# Altium PCB PCB1.PcbDoc
Units mm, origin at the board's own origin, x right, y up, seen from the top; angles counter-clockwise.
Board outline 149.97 x 82 mm, 2 copper layers (Top Layer, Bottom Layer); 144 components, 154 nets, 444 pads, 12 vias.
Unrouted connection lines stored in the file: 1.
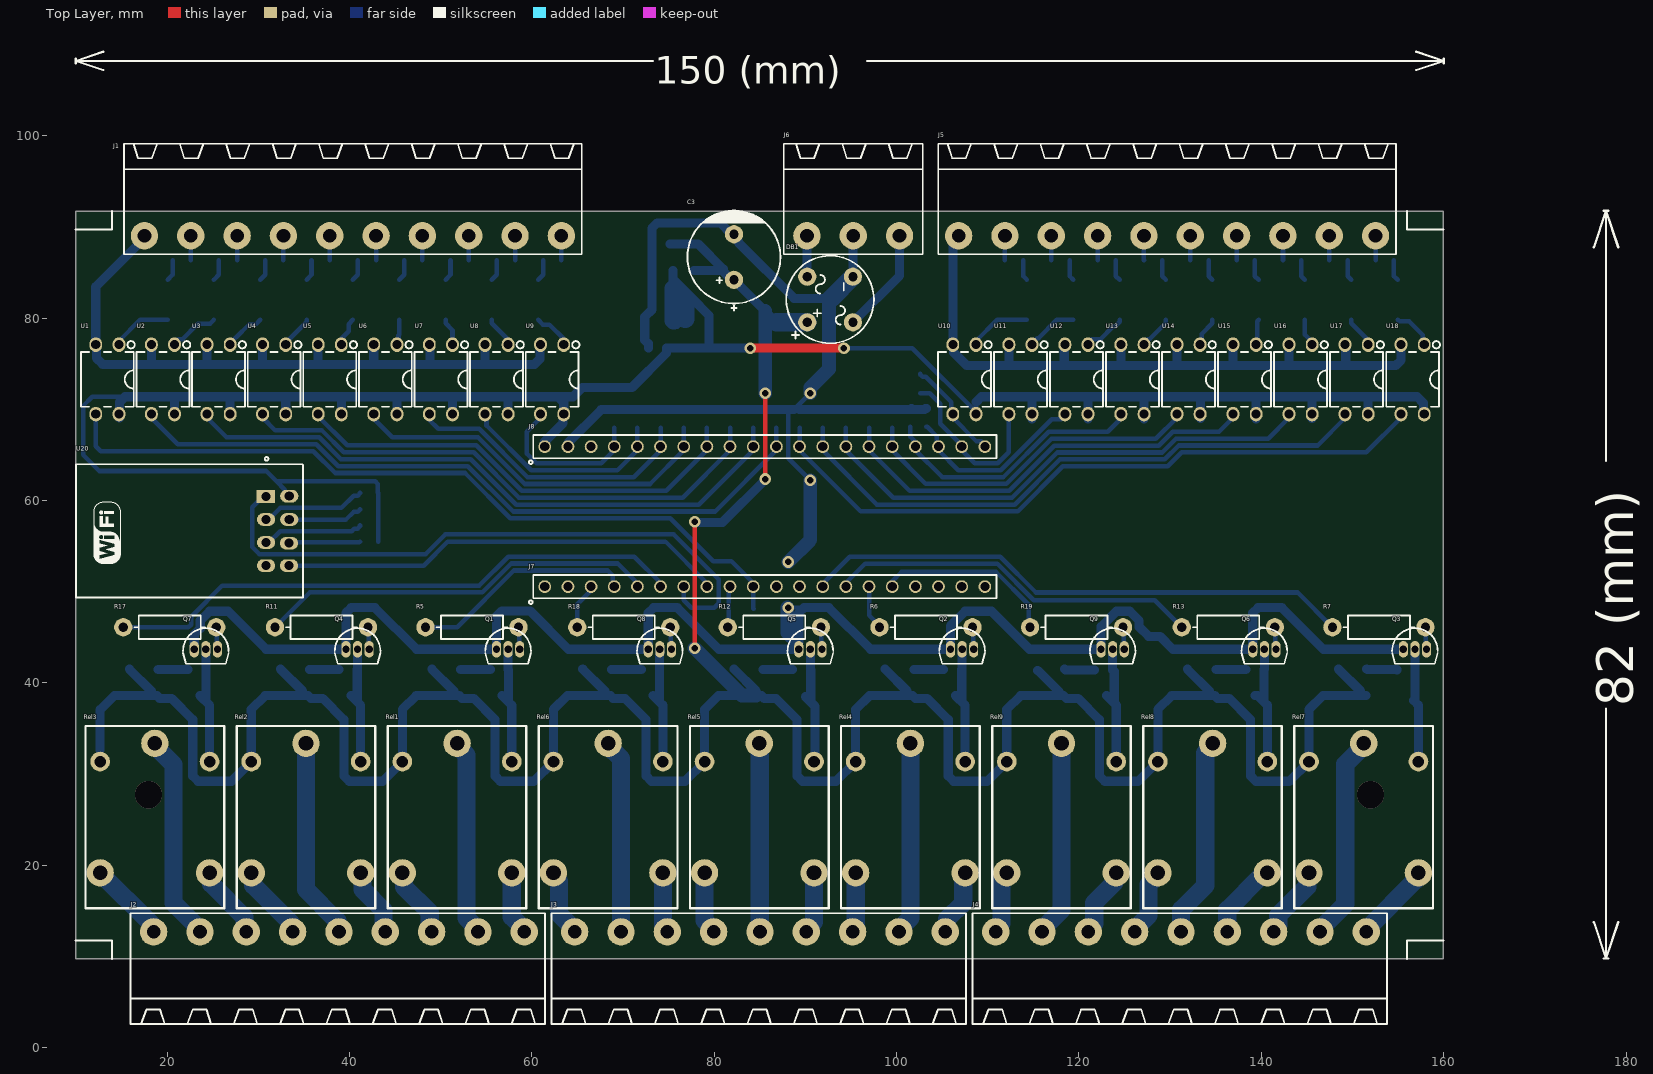
[diagram p0: Top Layer view]
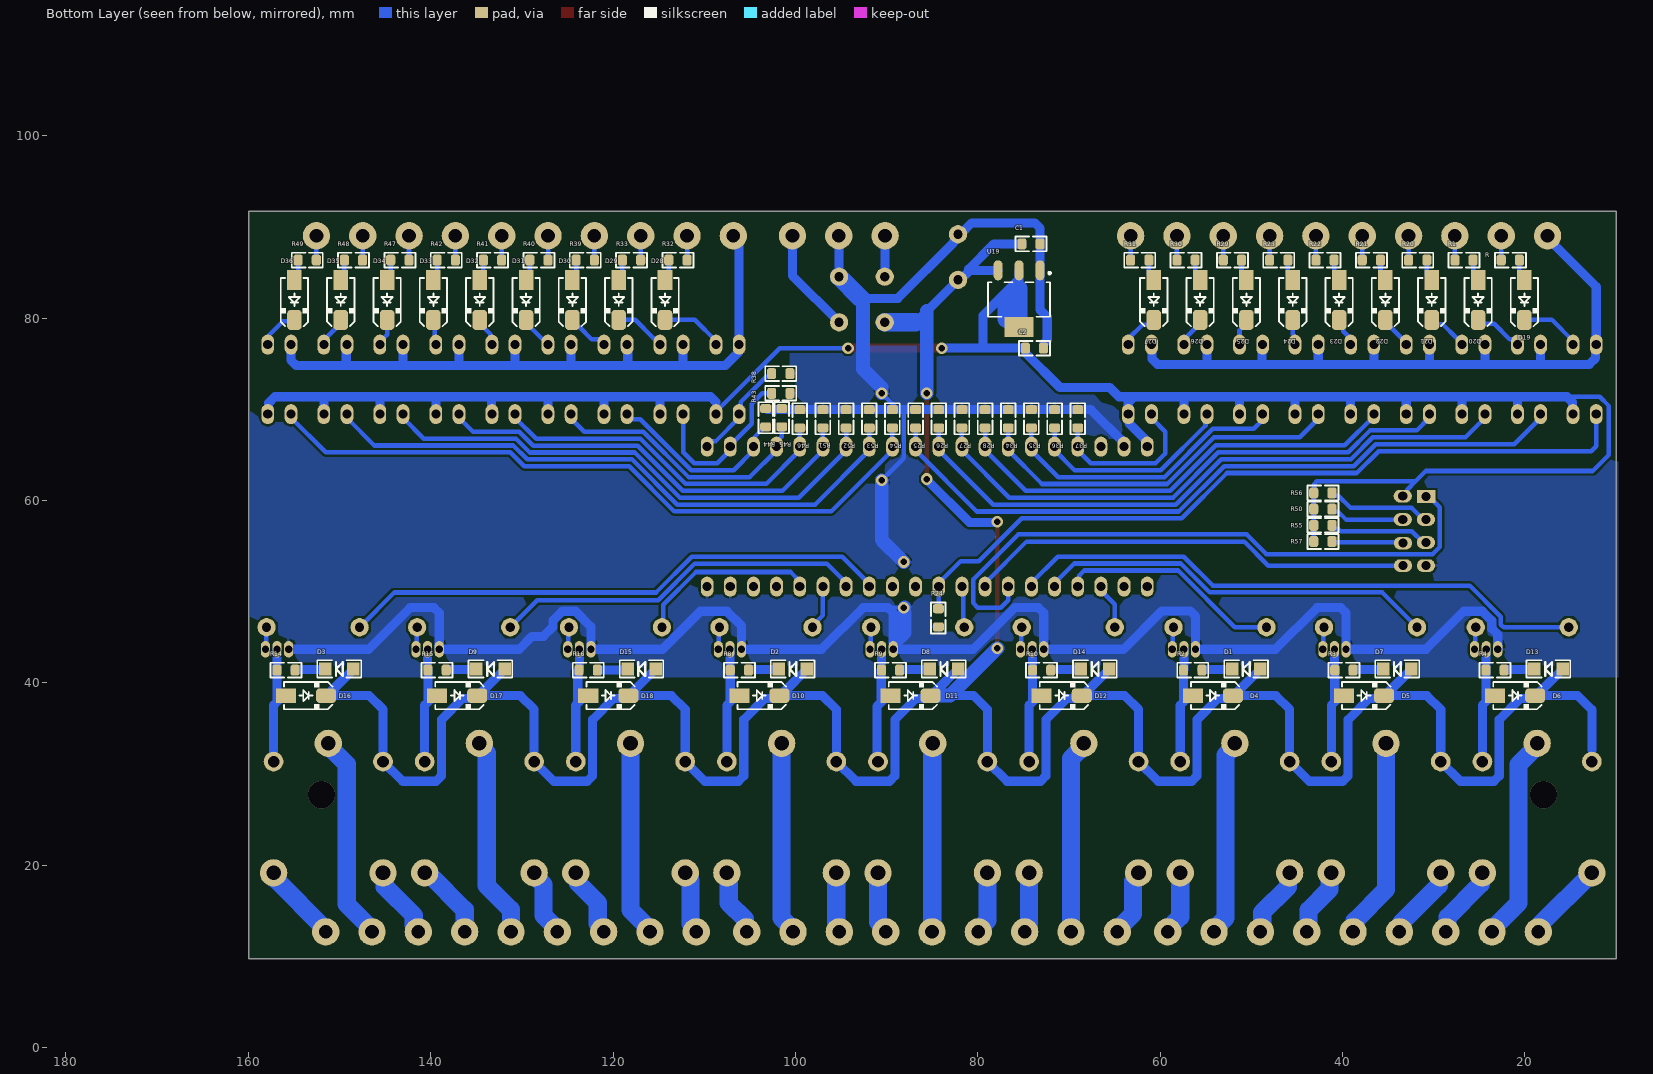
[diagram p1: Bottom Layer view, seen from below]

## Layer stack, top to bottom
Top Solder: solder mask 0.0102, Solder Resist, Dk 3.5
Top Layer: signal copper 0.0356
Dielectric 1: dielectric 0.32, FR-4, Dk 4.8
Bottom Layer: signal copper 0.0356
Bottom Solder: solder mask 0.0102, Solder Resist, Dk 3.5

## Board outline
10,9.744 159.967,9.744 159.967,91.744 10,91.744

## Design rules (kind name [scope] priority, off if disabled: settings)
Clearance [All] p1: gap=0.254 ignorepadtopadclearanceinfootprint=FALSE except(0: Arc-Hole Track-Hole SMDPad-Hole THPad-Hole Via-Hole Fill-Hole Poly-Hole Region-Hole Text-Hole)
DiffPairsRouting [All] p1: maxlimit=1 minlimit=0.3 mostfreqgap=0.4 toplayer_minwidth=0.4 toplayer_maxwidth=2 toplayer_prefwidth=0.4 bottomlayer_minwidth=0.4 bottomlayer_maxwidth=2 bottomlayer_prefwidth=0.4 maxuncoupledlength=12.7
PolygonConnect [All] p1: connectstyle=Relief reliefconductorwidth=0.254 reliefentries=4 polygonreliefangle="90 Angle" airgapwidth=0.254
RoutingVias [All] p1: holewidth=0.711 width=1.27 viastyle="Through Hole" minholewidth=0.711 minwidth=1.27 maxholewidth=0.711 maxwidth=1.27
SolderMaskExpansion [All] p1: expansion=0.102 istentingtop=FALSE
Width [All] p1: maxlimit=2 minlimit=0.3 preferedwidth=0.5
29 further rules are at their usual default settings.

## Components (designator, comment, footprint, x,y, rotation, side; value= is the part's Value field where it differs from the comment)
C1 "22uF" C0805 74.168,88.138 r0 bottom
C2 "22uF" C0805 73.787,76.708 r0 bottom
C3 "470uF" C_EL_10X16 82.169,86.701 r90 top
D1 "" "0805 LED" 50.571,41.529 r0 bottom
D2 "" "0805 LED" 100.292,41.529 r0 bottom
D3 "" "0805 LED" 150.012,41.529 r0 bottom
D4 "1N4007" D_SMA 54.229,38.608 r180 bottom
D5 "1N4007" D_SMA 37.655,38.608 r180 bottom
D6 "1N4007" D_SMA 21.082,38.608 r180 bottom
D7 "" "0805 LED" 33.998,41.529 r0 bottom
D8 "" "0805 LED" 83.718,41.529 r0 bottom
D9 "" "0805 LED" 133.439,41.529 r0 bottom
D10 "1N4007" D_SMA 103.95,38.608 r180 bottom
D11 "1N4007" D_SMA 87.376,38.608 r180 bottom
D12 "1N4007" D_SMA 70.802,38.608 r180 bottom
D13 "" "0805 LED" 17.424,41.529 r0 bottom
D14 "" "0805 LED" 67.145,41.529 r0 bottom
D15 "" "0805 LED" 116.865,41.529 r0 bottom
D16 "1N4007" D_SMA 153.67,38.608 r180 bottom
D17 "1N4007" D_SMA 137.096,38.608 r180 bottom
D18 "1N4007" D_SMA 120.523,38.608 r180 bottom
D19 "1N4007" D_SMA 20.066,82.001 r270 bottom
D20 "1N4007" D_SMA 25.146,82.001 r270 bottom
D21 "1N4007" D_SMA 30.226,82.001 r270 bottom
D22 "1N4007" D_SMA 35.306,82.001 r270 bottom
D23 "1N4007" D_SMA 40.386,82.001 r270 bottom
D24 "1N4007" D_SMA 45.466,82.001 r270 bottom
D25 "1N4007" D_SMA 50.546,82.001 r270 bottom
D26 "1N4007" D_SMA 55.626,82.001 r270 bottom
D27 "1N4007" D_SMA 60.706,82.001 r270 bottom
D28 "1N4007" D_SMA 114.3,82.001 r270 bottom
D29 "1N4007" D_SMA 119.38,82.001 r270 bottom
D30 "1N4007" D_SMA 124.46,82.001 r270 bottom
D31 "1N4007" D_SMA 129.54,82.001 r270 bottom
D32 "1N4007" D_SMA 134.62,82.001 r270 bottom
D33 "1N4007" D_SMA 139.7,82.001 r270 bottom
D34 "1N4007" D_SMA 144.78,82.001 r270 bottom
D35 "1N4007" D_SMA 149.86,82.001 r270 bottom
D36 "1N4007" D_SMA 154.94,82.001 r270 bottom
DB1 "BR-WOB" DBRG_C10 92.71,82.042 r90 top
J1 "CONN_TB10" MSTB_10 40.386,89.027 r0 top
J2 "CONN_TB9" MSTB_9 38.855,12.7 r180 top
J3 "CONN_TB9" MSTB_9 85.023,12.7 r180 top
J4 "CONN_TB9" MSTB_9 131.191,12.7 r180 top
J5 "CONN_TB10" MSTB_10 129.667,89.027 r0 top
J6 "CONN_TB3" MSTB_3 95.25,89.027 r0 top
J7 "HDRF20" HDR_F_1X20 85.553,50.554 r0 top
J8 "HDRF20" HDR_F_1X20 85.553,65.904 r0 top
Q1 "C945" TO92_3 57.404,43.688 r0 top
Q2 "C945" TO92_3 107.188,43.688 r0 top
Q3 "C945" TO92_3 156.845,43.688 r0 top
Q4 "C945" TO92_3 40.894,43.688 r0 top
Q5 "C945" TO92_3 90.551,43.688 r0 top
Q6 "C945" TO92_3 140.335,43.688 r0 top
Q7 "C945" TO92_3 24.257,43.688 r0 top
Q8 "C945" TO92_3 74.041,43.688 r0 top
Q9 "C945" TO92_3 123.698,43.688 r0 top
R "100K" R0805#1 21.606,86.36 r180 bottom
R1 "100K" R0805#2 26.686,86.36 r180 bottom
R2 "2.2K" R0805#1 56.429,41.402 r180 bottom
R3 "2.2K" R0805#1 39.856,41.4 r180 bottom
R4 "2.2K" R0805#1 23.282,41.4 r180 bottom
R5 "1K" R025W_AX04 53.447,46.101 r0 top
R6 "1K" R025W_AX04 103.231,46.101 r0 top
R7 "1K" R025W_AX04 152.888,46.101 r0 top
R8 "2.2K" R0805#1 106.15,41.4 r180 bottom
R9 "2.2K" R0805#1 89.576,41.4 r180 bottom
R10 "2.2K" R0805#1 73.003,41.4 r180 bottom
R11 "1K" R025W_AX04 36.937,46.101 r0 top
R12 "1K" R025W_AX04 86.594,46.101 r0 top
R13 "1K" R025W_AX04 136.378,46.101 r0 top
R14 "2.2K" R0805#1 155.87,41.4 r180 bottom
R15 "2.2K" R0805#1 139.297,41.4 r180 bottom
R16 "2.2K" R0805#1 122.723,41.4 r180 bottom
R17 "1K" R025W_AX04 20.3,46.101 r0 top
R18 "1K" R025W_AX04 70.084,46.101 r0 top
R19 "1K" R025W_AX04 119.741,46.101 r0 top
R20 "100K" R0805#1 31.766,86.36 r180 bottom
R21 "100K" R0805#1 36.846,86.36 r180 bottom
R22 "100K" R0805#1 41.926,86.36 r180 bottom
R23 "100K" R0805#1 47.006,86.36 r180 bottom
R24 "1K" R0805#1 84.328,47.133 r90 bottom
R25 "1K" R0805#1 86.823,68.961 r270 bottom
R26 "1K" R0805#1 84.283,68.961 r270 bottom
R27 "1K" R0805#1 81.743,68.961 r270 bottom
R28 "1K" R0805#1 79.203,68.961 r270 bottom
R29 "100K" R0805#1 52.086,86.36 r180 bottom
R30 "100K" R0805#1 57.166,86.36 r180 bottom
R31 "100K" R0805#1 62.246,86.36 r180 bottom
R32 "100K" R0805#1 112.887,86.36 r0 bottom
R33 "100K" R0805#1 117.969,86.36 r0 bottom
R34 "1K" R0805#1 76.663,68.961 r270 bottom
R35 "1K" R0805#1 74.123,68.961 r270 bottom
R36 "1K" R0805#1 71.583,68.961 r270 bottom
R37 "1K" R0805#1 69.043,68.961 r270 bottom
R38 "1K" R0805#1 101.608,73.914 r0 bottom
R39 "100K" R0805#1 123.051,86.36 r0 bottom
R40 "100K" R0805#1 128.133,86.36 r0 bottom
R41 "100K" R0805#1 133.215,86.36 r0 bottom
R42 "100K" R0805#1 138.297,86.36 r0 bottom
R43 "1K" R0805#1 101.608,71.755 r0 bottom
R44 "1K" R0805#1 103.266,69.08 r270 bottom
R45 "1K" R0805#1 101.503,69.08 r270 bottom
R46 "1K" R0805#1 99.523,68.961 r270 bottom
R47 "100K" R0805#1 143.379,86.36 r0 bottom
R48 "100K" R0805#1 148.461,86.36 r0 bottom
R49 "100K" R0805#1 153.543,86.36 r0 bottom
R50 "2.2K" R0805#1 42.164,59.055 r180 bottom
R51 "1K" R0805#1 96.983,68.961 r270 bottom
R52 "1K" R0805#1 94.443,68.961 r270 bottom
R53 "1K" R0805#1 91.903,68.961 r270 bottom
R54 "1K" R0805#1 89.363,68.961 r270 bottom
R55 "2.2K" R0805#1 42.164,57.277 r180 bottom
R56 "2.2K" R0805#1 42.164,60.833 r180 bottom
R57 "2.2K" R0805#1 42.164,55.499 r180 bottom
Rel1 "RelayGH-1C-12L" GH-1C-12L 51.808,25.273 r90 top
Rel2 "RelayGH-1C-12L" GH-1C-12L 35.239,25.273 r90 top
Rel3 "RelayGH-1C-12L" GH-1C-12L 18.669,25.273 r90 top
Rel4 "RelayGH-1C-12L" GH-1C-12L 101.517,25.273 r90 top
Rel5 "RelayGH-1C-12L" GH-1C-12L 84.947,25.273 r90 top
Rel6 "RelayGH-1C-12L" GH-1C-12L 68.378,25.273 r90 top
Rel7 "RelayGH-1C-12L" GH-1C-12L 151.226,25.273 r90 top
Rel8 "RelayGH-1C-12L" GH-1C-12L 134.656,25.273 r90 top
Rel9 "RelayGH-1C-12L" GH-1C-12L 118.087,25.273 r90 top
U1 "PC817" DIP_4 13.462,73.279 r270 top
U2 "PC817" DIP_4 19.558,73.279 r270 top
U3 "PC817" DIP_4 25.654,73.279 r270 top
U4 "PC817" DIP_4 31.75,73.279 r270 top
U5 "PC817" DIP_4 37.846,73.279 r270 top
U6 "PC817" DIP_4 43.942,73.279 r270 top
U7 "PC817" DIP_4 50.038,73.279 r270 top
U8 "PC817" DIP_4 56.134,73.279 r270 top
U9 "PC817" DIP_4 62.23,73.279 r270 top
U10 "PC817" DIP_4 107.442,73.279 r270 top
U11 "PC817" DIP_4 113.586,73.279 r270 top
U12 "PC817" DIP_4 119.729,73.279 r270 top
U13 "PC817" DIP_4 125.873,73.279 r270 top
U14 "PC817" DIP_4 132.017,73.279 r270 top
U15 "PC817" DIP_4 138.16,73.279 r270 top
U16 "PC817" DIP_4 144.304,73.279 r270 top
U17 "PC817" DIP_4 150.447,73.279 r270 top
U18 "PC817" DIP_4 156.591,73.279 r270 top
U19 "LD1117-3.3" SOT223_4 75.482,82.042 r270 bottom
U20 "ESP-01" ESP8266_ESP01 32.118,56.667 r90 top

## Footprints (in the part's own frame and the unit in brackets; to place one, negate y for a bottom-side part, rotate by r counter-clockwise, add the part's x,y. Pads: shape width x height; smd on the part's side, far side on the other; paste and mask are expansions set on the pad)
"0805 LED" [mil]
  rect 54x55 smd: 1(-61,0) 2(61,0)
  silkscreen extent -94,-37 95,37, body extent -40,-25 40,25, height 43
C0805 [mm] "CHIP Capacitor, 2.0X1.3mm, 0805"
  rrect50% 1x1.2 smd paste-0.1 mask+0.075: 1(-1,0) 2(1,0)
  Top Layer pour cut-out: -0.5,0.8 0.5,0.8 0.5,-0.8 -0.5,-0.8
  silkscreen extent -1.7,-0.8 1.7,0.8, body extent -1,-0.63 1,0.63, height 1
C_EL_10X16 [mm] "Capacitor Electrolythic, D10.0X16.0H pitch: 5.0mm"
  round 2 hole 1: 1(-2.5,0) 2(2.5,0)
  silkscreen extent -5.9,-5.1 5.1,5.1, body extent -5,-5 5,5, height 16
D_SMA [mm] "SMA Molded Diode, 2-Leads, Body 4.3x2.7mm, SOD-128"
  rect 2.2x1.6 smd paste-0.1: 1(-2.2,0)
  rrect50% 2.2x1.6 smd paste-0.1: 2(2.2,0)
  silkscreen extent -2.4,-1.5 2.9,1.5, body extent -2.75,-1.4 2.75,1.4, height 2.6
DBRG_C10 [mm] "BRDIGE RECTIFIER, WOB WOG, pitch: 5.08mm, 10X10mm"
  round 2 hole 1: 1(-2.5,2.5) 2(-2.5,-2.5) 3(2.5,-2.5) 4(2.5,2.5)
  silkscreen extent -4.8,-4.8 4.8,4.8, body extent -4.65,-4.64 4.65,4.64, height 5.6
DIP_4 [mm] "BRIDGE DIODE, DIP, pitch 2.54mm, 300mil Width"
  oval 1.6x1.4 / inner round 1.4 / far side oval 2.2x1.4 hole 1: 1(-3.81,1.27) 2(-3.81,-1.27) 3(3.81,-1.27) 4(3.81,1.27)
  silkscreen extent -4.2,-2.9 3,3, body extent -4,-2.77 4,2.77, height 4.31
ESP8266_ESP01 [mm] "ESP8266 ESP-01 Wi07C"
  rect 1.4x2 hole 1: 1(3.785,1.283)
  oval 1.4x2 hole 1: 2(3.81,-1.283) 3(1.245,1.257) 4(1.245,-1.283) 5(-1.27,1.257) 6(-1.346,-1.257) 7(-3.81,1.257) 8(-3.81,-1.257)
  silkscreen extent -7.29,-2.78 8.1,22.09, body extent -7.26,-2.76 7.24,22.04
GH-1C-12L [mm]
  round 3 hole 1.6: 1(8.1,0) 3(-6.1,6) 4(-6.1,-6)
  round 2.159 hole 1.27: 2(6.1,6) 5(6.1,-6)
  silkscreen extent -10,-7.6 10,7.6, body extent -9.71,-7.98 9.79,7.92, height 15
HDR_F_1X20 [mm] "Connector; Header; 20 Position"
  round 1.4 / inner round 1.4 / far side oval 1.4x2.2 hole 1: 1(-24.13,0) 2(-21.59,0) 3(-19.05,0) 4(-16.51,0) 5(-13.97,0) 6(-11.43,0) 7(-8.89,0) 8(-6.35,0) 9(-3.81,0) 10(-1.27,0) 11(1.27,0) 12(3.81,0) 13(6.35,0) 14(8.89,0) 15(11.43,0) 16(13.97,0) 17(16.51,0) 18(19.05,0) 19(21.59,0) 20(24.13,0)
  silkscreen extent -25.86,-1.9 25.4,1.27, body extent -25.4,-1.27 25.4,1.27, height 8.5
MSTB_3 [mm] "PHOENIX MSTB 2, 5-G, 5.08mm pitch, 3pin"
  round 3 hole 1.5: 1(-5.08,0) 2(0,0) 3(5.08,0)
  silkscreen extent -7.62,-2.03 7.62,10.1, body extent -7.5,-2 7.5,10, height 8.6
MSTB_9 [mm] "PHOENIX MSTB 2, 5-G, 5.08mm pitch"
  round 3 hole 1.5: 1(-20.32,0) 2(-15.24,0) 3(-10.16,0) 4(-5.08,0) 5(0,0) 6(5.08,0) 7(10.16,0) 8(15.24,0) 9(20.32,0)
  silkscreen extent -22.6,-2.03 22.86,10.1, body extent -22.5,-2 22.5,10, height 8.6
MSTB_10 [mm] "PHOENIX MSTB 2, 5-G, 5.08mm pitch"
  round 3 hole 1.5: 1(-22.86,0) 2(-17.78,0) 3(-12.7,0) 4(-7.62,0) 5(-2.54,0) 6(2.54,0) 7(7.62,0) 8(12.7,0) 9(17.78,0) 10(22.86,0)
  silkscreen extent -25.1,-2.03 25.1,10.1, body extent -25,-2 25,10, height 8.6
R025W_AX04 [mm] "RESISTOR 1/4 WATT, AXIAL0.4"
  round 2 hole 1: 1(-5.1,0) 2(5.1,0)
  silkscreen extent -3.9,-1.3 3.9,1.3, body extent -5.38,-1.28 5.38,1.28, height 2.6
R0805#1 [mm] "CHIP RESISTOR 1/8 WATT ,2.0X1.3mm, 0805, 2012"
  rrect50% 1x1.2 smd paste-0.1 mask+0.075: 1(-1,0) 2(1,0)
  Top Layer pour cut-out: -0.5,0.8 0.5,0.8 0.5,-0.8 -0.5,-0.8
  silkscreen extent -1.7,-0.8 1.7,0.8, body extent -1.15,-0.67 1.15,0.67, height 0.76
R0805#2 [mm] "CHIP RESISTOR 1/8 WATT ,2.0X1.3mm, 0805, 2012"
  rrect50% 1x1.2 smd paste-0.1 mask+0.075: 2(1,0) " "(-1,0)
  Top Layer pour cut-out: -0.5,0.8 0.5,0.8 0.5,-0.8 -0.5,-0.8
  silkscreen extent -1.7,-0.8 1.7,0.8, body extent -1.15,-0.67 1.15,0.67, height 0.76
SOT223_4 [mm] "SOT223, 4-Leads, Body 6.5x3.5mm, Pitch 2.30mm"
  oval 2.2x1 smd: 1(-3.2,2.3) 2(-3.2,0) 3(-3.2,-2.3)
  rect 2.2x3.2 smd paste-5: 4(3,0)
  Top Layer pour cut-out: -1.7,3.556 1.7,3.556 1.7,-3.556 -1.7,-3.556
  silkscreen extent -3.02,-3.4 1.9,3.47, body extent -3.5,-3.25 3.5,3.25, height 1.7
TO92_3 [mm] "TO-92, SOT54"
  oval 1x1.8 hole 0.8 mask+0.1: 1(-1.27,0) 2(0,0) 3(1.27,0)
  silkscreen extent -2.5,-1.59 2.5,2.3, body extent -2.38,-1.45 2.38,2.18, height 7.82

## Part data
C1 C2: library part CAP_SMD_MLCC_10u25V, "CAP, MLCC, X5R 10uF 10% 25V 0805", MANF="Taiyo Yuden", MANF_P#=TMK212BBJ106MG, PARAM="X5R, 10%", PARAM2=25V, Price=100=6$
C3: library part CAP_THD_EL_470uF_35v, "CAP, THD, ELEC,", ASSEMBLY=ASSEMBLY, DESC=DESCRIPTION, DIST#=MOUSER, MANF=MANF, MANF_P#=MANF_PART#, PARAM=20%, PARAM2=35v, Price="10= -$"
D1 D2 D3 D7 D8 D9 D13 D14 D15: library part LED, "Led", LatestRevisionDate=08-Jul-2005, LatestRevisionNote="Mech Layer 1 removed.", PackageReference=LED-0, Published=8-Jun-2000, Publisher="Altium Limited"
D4 D5 D6 D10 D11 D12 D16 D17 D18 D19 D20 D21 D22 D23 D24 D25 D26 D27 D28 D29 D30 D31 D32 D33 D34 D35 D36: library part DIODE_SMD_1N4007, "DIODE, GENERAL PURPOSE, 1000V/1A", ASSEMBLY=ASSEMBLY, DESC=DESCRIPTION, MANF=Kingtronics, MANF_P#=M7, PARAM="1000V VRRM", PARAM2=1A, Price=PRICE
DB1: library part DIODE_THD_BRIDGE_WO, "DIODE, BRIDGE,"
J1 J5: library part CONN_MSTB_10, "CONN, PHOENIX MSTB, 5-G, 5.08mm pitch", PARAM=12A, PARAM2=320V
J2 J3 J4: library part CONN_MSTB_9, "CONN, PHOENIX MSTB, 5-G, 5.08mm pitch", PARAM=12A, PARAM2=320V
J6: library part CONN_MSTB_3, "CONN, PHOENIX MSTB, 5-G, 5.08mm pitch", PARAM=12A, PARAM2=320V
J7 J8: library part HDR_F_1X20, "CONN, HEADER, Female, pitch: 2.54mm, 20POS"
Q1 Q2 Q3 Q4 Q5 Q6 Q7 Q8 Q9: library part NPN_C945_TO92, "BJT, NPN, 50v, 0.15A, THD, TO92, BC945", MANF=-, MANF_P#="C945, 2SC945, BC945", PARAM="50v, 0.15A", PARAM2=250mW
R: library part RES_SMD_0805, "RESISTOR, SMD", ASSEMBLY=ASSEMBLY, DESC=DESCRIPTION, DIST#=MOUSER, MANF=-, MANF_P#=-, PARAM=-W, PARAM2=1%, Price="100= 0.5$"
R1 R2 R3 R4 R8 R9 R10 R14 R15 R16 R20 R21 R22 R23 R24 R25 R26 R27 R28 R29 R30 R31 R32 R33 R34 R35 R36 R37 R38 R39 R40 R41 R42 R43 R44 R45 R46 R47 R48 R49 R50 R51 R52 R53 R54 R55 R56 R57: library part RES_SMD, "RESISTOR, SMD", ASSEMBLY=ASSEMBLY, DESC=DESCRIPTION, DIST#=MOUSER, MANF=-, MANF_P#=-, PARAM=-W, PARAM2=1%, Price="100= 0.5$"
R5 R6 R7 R11 R12 R13 R17 R18 R19: library part RES_THD, "RESISTOR, THD", ASSEMBLY=ASSEMBLY, DESC=DESCRIPTION, DIST#=MOUSER, MANF="KOA SPEER", MANF_P#=RK73H1ETTP4701F, PARAM=0.063W, PARAM2=1%, Price="100= 0.5$"
Rel1 Rel2 Rel3 Rel4 Rel5 Rel6 Rel7 Rel8 Rel9: "HJR-3FF-12VDC-S-Z"
U1 U2 U3 U4 U5 U6 U7 U8 U9 U10 U11 U12 U13 U14 U15 U16 U17 U18: library part OPTC_TR4P_PC817, "OPTOCOUPLER, TRANSISTOR, 4PIN", MANF=SHARP, MANF_P#=PC817, PARAM=IF=20mA, PARAM2="VCE = 35V", Price=-
U19: library part VREG_1117_SOT223, "REG, Linear, LDO1V, 0.8A, SOT-223", MANF="TI, ON, ST", MANF_P#="LD1117, LM1117, AMS1117, TLV1117, REG1117, NCP1117, LT1117, SPX1117", PARAM="LDO1V, 0.8A", PARAM2=1.2/1.5/1.8/2.5/2.85/3.3/5V
U20: library part ESP8266_ESP-01, "ESP8266 ESP-01 WiFi Module", MANF_P#=ESP-01

## Via types
v1: diameter 1.27, hole 0.711, Top Layer to Bottom Layer, 10 vias
v2: diameter 3, hole 3, Top Layer to Bottom Layer, 2 vias

## Nets (pads, with @x,y where several pads share a name; then routed paths per layer and width w, separated by ;. In a path a pad name is that pad's centre, name@x,y a point inside that pad or via, vN(x,y) a via of type N, cw(c..) or ccw(c..) an arc to the next point about the centre after c; other vN are vias at no path point)
3.3V: C2.2 J7.18 J8.1 R50.1 R55.1 R56.1 R57.1 U1.4 U2.4 U3.4 U4.4 U5.4 U6.4 U7.4 U8.4 U9.4 U10.4 U11.4 U12.4 U13.4 U14.4 U15.4 U16.4 U17.4 U18.4 U19.2 U19.4 U20.2 | length 259.6
  Top Layer w1: v1(83.959,76.708) v1(94.234,76.708)
  Bottom Layer w0.5: 15.394,71.374 11.811,71.374 10.795,70.358 10.795,65.024 12.583,63.236 30.871,63.236 32.004,62.103 ; U20.2@33.419,60.477 U20.2 33.345,60.477 32.929,60.893 32.929,61.178 32.004,62.103 ; R57.1 R55.1 R50.1 R56.1 43.127,60.87 43.127,61.81 42.834,62.103 32.004,62.103 ; J8.1 J8.1@61.423,66.489 ; U19.4 75.982,79.042 U19.4@76.832,79.892 ; 76.832,81.624 77.467,82.26 ; v1(94.234,76.708) 101.727,76.708 108.712,69.723 U10.4 ; U10.4@108.712,69.977 U10.4@108.712,70.492
  Bottom Layer w1: U1.4@14.809,69.038 14.809,70.788 15.394,71.374 20.828,71.374 ; U2.4 20.828,71.374 ; U3.4 26.924,71.374 ; U4.4 33.02,71.374 ; U5.4 39.116,71.247 38.989,71.374 ; U6.4 45.212,71.374 ; U7.4 51.308,71.247 51.181,71.374 ; U8.4 57.404,71.247 57.277,71.374 ; J8.1@61.423,66.489 61.499,66.489 61.623,66.612 61.623,66.689 63.423,68.489 63.423,69.392 U9.4 63.5,70.739 62.865,71.374 ; U19.2 75.482,84.245 76.036,83.691 77.467,82.26 79.453,80.274 79.453,76.708 ; v1(83.959,76.708) 79.453,76.708 ; 108.712,70.788 109.298,71.374 114.856,71.374 ; U11.4@114.856,68.961 U11.4 114.856,71.374 ; U12.4@120.999,68.961 U12.4 120.999,71.374 ; U13.4@127.143,68.961 U13.4 127.143,71.374 ; U14.4@133.35,69.025 133.35,71.374 ; U15.4@139.43,68.961 U15.4 139.43,71.374 ; U16.4@145.542,68.993 145.542,71.374 ; U17.4 151.717,71.042 ; U18.4 157.784,69.546 157.784,70.673 157.083,71.374 145.542,71.374 ; 20.828,71.374 26.924,71.374 ; 26.924,71.374 33.02,71.374 ; 33.02,71.374 38.989,71.374 ; 38.989,71.374 45.212,71.374 ; 45.212,71.374 51.181,71.374 ; 51.181,71.374 57.277,71.374 ; 57.277,71.374 62.865,71.374 ; 62.865,71.374 64.516,71.374 65.532,72.39 70.993,72.39 74.787,76.184 C2.2 79.453,76.708 ; 114.856,71.374 120.999,71.374 ; 120.999,71.374 127.143,71.374 ; 127.143,71.374 133.35,71.374 ; 133.35,71.374 139.43,71.374 ; 139.43,71.374 145.542,71.374
  Bottom Layer w2: U19.4@75.565,79.756 75.565,83.22 ; U19.4@76.832,79.892 76.832,81.624
5V: J8.3
12V: C1.2 C3.1 D1.1 D2.1 D3.1 D4.2 D5.2 D6.2 D7.1 D8.1 D9.1 D10.2 D11.2 D12.2 D13.1 D14.1 D15.1 D16.2 D17.2 D18.2 DB1.1 Rel1.2 Rel2.2 Rel3.2 Rel4.2 Rel5.2 Rel6.2 Rel7.2 Rel8.2 Rel9.2 U19.3 | length 364.2
  Top Layer w0.5: v1(77.851,43.815) 77.867,43.831 77.867,51.053 77.851,51.069 v1(77.851,57.654) ; v1(85.598,62.357) v1@85.598,71.628
  Bottom Layer w1: 12.669,32.643 12.669,37.053 14.224,38.608 D6.2 18.909,38.608 19.209,38.308 20.493,38.308 22.824,35.977 22.824,29.796 23.409,29.21 27.076,29.21 Rel2.2 29.239,37.089 30.757,38.608 D5.2 35.479,38.608 35.779,38.308 37.063,38.308 39.393,35.977 39.393,29.796 39.979,29.21 43.645,29.21 Rel1.2 45.808,37.089 47.327,38.608 D4.2 52.048,38.608 52.348,38.308 53.632,38.308 55.963,35.977 55.963,29.796 56.549,29.21 60.215,29.21 Rel6.2 62.378,37.089 63.897,38.608 D12.2 68.618,38.608 68.918,38.308 70.202,38.308 72.533,35.977 72.533,29.796 73.118,29.21 76.784,29.21 Rel5.2 78.947,37.089 80.466,38.608 83.058,38.608 ; D13.1@15.875,41.516 D6.2@18.282,39.109 ; D7.1@32.448,41.516 D5.2@34.856,39.109 ; D1.1@49.041,41.516 D4.2@51.448,39.109 ; D14.1@65.596,41.516 D12.2@68.003,39.109 ; C1.2 78.232,88.138 80.993,85.377 ; U19.3 80.857,85.242 81.898,84.201 C3.1 85.598,80.772 86.828,79.542 ; v1(77.851,57.654) 77.903,57.602 80.916,57.602 85.598,62.284 v1(85.598,62.357) ; D8.1@82.181,41.516 D11.2@84.588,39.109 ; D11.2@84.582,38.608 D11.2 85.188,38.608 85.488,38.308 86.771,38.308 89.102,35.977 89.102,29.796 89.688,29.21 93.354,29.21 Rel4.2 95.517,37.089 97.036,38.608 D10.2 101.757,38.608 102.057,38.308 103.341,38.308 105.672,35.977 105.672,29.796 106.258,29.21 109.924,29.21 Rel9.2 112.087,37.089 113.605,38.608 D18.2 118.327,38.608 118.627,38.308 119.911,38.308 122.241,35.977 122.241,29.796 122.827,29.21 126.493,29.21 Rel8.2 128.656,37.089 130.175,38.608 D17.2 135.196,38.308 136.48,38.308 138.811,35.977 138.811,29.796 139.397,29.21 143.063,29.21 Rel7.2 145.226,37.089 146.745,38.608 D16.2@151.17,38.608 ; D2.1@98.742,41.516 D10.2@101.15,39.109 ; D15.1@115.47,41.366 D18.2@117.877,38.959 ; D9.1@131.889,41.516 D17.2@134.297,39.109 ; D3.1 148.463,41.516 150.87,39.109 150.87,38.908 D16.2@151.17,38.608 ; D16.2 D16.2@151.17,38.608
  Bottom Layer w1.5: v1(77.851,43.815) 83.058,38.608 D11.2@84.582,38.608 ; v1(85.598,71.755) 85.598,80.772
  Bottom Layer w2: 86.828,79.542 DB1.1
com-Rel1: J2.2 Rel1.1 | length 21.6
  Bottom Layer w2: Rel1.1 51.808,33.102 52.832,32.079 52.832,14.234 54.095,12.971 J2.2
com-Rel2: J2.5 Rel2.1 | length 22.2
  Bottom Layer w2: Rel2.1 35.239,17.339 38.664,13.914 38.664,12.891 J2.5
com-Rel3: J2.8 Rel3.1 | length 22.7
  Bottom Layer w2: Rel3.1 18.669,33.102 20.721,31.05 20.721,15.865 23.615,12.971 J2.8
com-Rel4: J3.2 Rel4.1 | length 21.2
  Bottom Layer w2: J3.2 100.263,12.971 101.517,14.225 Rel4.1
com-Rel5: J3.5 Rel5.1 | length 20.7
  Bottom Layer w2: Rel5.1 84.985,33.335 84.985,12.738 J3.5
com-Rel6: J3.8 Rel6.1 | length 21.3
  Bottom Layer w2: Rel6.1 68.378,33.102 69.783,31.697 J3.8
com-Rel7: J4.2 Rel7.1 | length 22.7
  Bottom Layer w2: J4.2 146.431,12.971 149.213,15.753 149.213,31.089 151.226,33.102 Rel7.1
com-Rel8: J4.5 Rel8.1 | length 22.1
  Bottom Layer w2: J4.5 131.191,15.113 133.858,17.78 133.858,32.304 134.656,33.102 Rel8.1
com-Rel9: J4.8 Rel9.1 | length 21.6
  Bottom Layer w2: J4.8 115.951,12.971 118.087,15.106 Rel9.1
GND: C1.1 C2.1 C3.2 DB1.3 J6.2 J7.19 J7.20 J8.2 Q1.1 Q2.1 Q3.1 Q4.1 Q5.1 Q6.1 Q7.1 Q8.1 Q9.1 R24.1 R25.1 R26.1 R27.1 R28.1 R34.1 R35.1 R36.1 R37.1 R38.1 R43.1 R44.1 R45.1 R46.1 R51.1 R52.1 R53.1 R54.1 U19.1 U20.7 | length 302.1
  Bottom Layer w0.4: v1(88.128,48.26) 89.867,48.26
  Bottom Layer w0.5: v1@88.011,48.26 v1(88.128,48.26) ; R54.1@89.06,70.264 v1(90.551,71.755) ; R54.1 88.757,69.961 88.249,69.961 88.138,69.85 88.138,64.643 v1(90.551,62.23)
  Bottom Layer w1: Q7.1 22.987,45.319 23.646,45.978 23.646,46.828 24.673,47.855 26.694,47.855 30.861,43.688 Q4.1 39.624,47.674 40.21,48.26 42.799,48.26 47.371,43.688 Q1.1 56.134,47.305 56.72,47.891 59.805,47.891 64.008,43.688 Q8.1 72.771,47.674 73.357,48.26 75.946,48.26 80.518,43.688 Q5.1@89.047,43.688 ; J8.2 63.963,66.304 67.62,69.961 R37.1 R36.1 R35.1 R34.1 R28.1 R27.1 R26.1 R25.1 88.757,69.961 ; C2.1 72.787,77.2 72.39,77.597 72.39,80.13 73.182,80.923 U19.1 73.182,85.842 73.168,85.856 C1.1 73.168,89.854 73.754,90.44 80.659,90.44 81.898,89.201 C3.2 82.169,88.93 82.669,88.43 82.669,88.273 88.773,82.169 92.837,82.169 ; Q5.1@89.281,44.45 89.281,47.674 89.867,48.26 90.678,48.26 92.583,48.26 97.155,43.688 Q2.1 105.918,46.256 107.517,47.855 110.406,47.855 114.573,43.688 Q9.1 122.428,46.169 124.114,47.855 125.568,47.855 126.603,46.819 126.603,46.133 127.639,45.097 128.893,45.097 130.302,43.688 Q6.1 139.065,47.674 139.651,48.26 142.24,48.26 146.812,43.688 Q3.1 ; R54.1 R53.1 R52.1 R51.1 R46.1 R45.1@101.503,69.961 ; DB1.3@95.23,84.562 95.23,89.007 J6.2 ; R45.1@101.624,70.082 R45.1@101.503,69.961 ; R44.1 103.166,70.08 103.047,69.961 R45.1@101.503,69.961
  Bottom Layer w1.5: v1@88.011,48.26 88.011,45.486 Q5.1@89.047,44.45 ; v1(88.128,53.258) 90.551,55.681 v1(90.551,62.23) ; v1(90.551,71.755) 90.551,72.39 92.583,74.422 92.583,82.169
  Bottom Layer w2: 92.837,82.169 DB1.3 DB1.3@95.23,84.562
IN220vacPUT01: J1.2 R.1 | length 2.7
  Bottom Layer w0.5: R.1 J1.2
IN220vacPUT1N: J1.1 U1.2 U2.2 U3.2 U4.2 U5.2 U6.2 U7.2 U8.2 U9.2 | length 81.8
  Bottom Layer w1: J1.1 17.526,88.773 12.192,83.439 U1.2 12.269,77.012 12.269,75.615 12.954,74.93 18.288,74.93 ; U2.2 18.288,74.93 ; U3.2 24.384,75.057 24.257,74.93 ; U4.2 30.48,75.057 30.607,74.93 ; U5.2 36.576,74.93 ; U6.2 42.672,75.057 42.799,74.93 ; U7.2 48.845,77.012 48.845,75.107 49.022,74.93 ; U8.2 54.864,74.93 ; U9.2 60.883,77.012 60.883,75.516 60.298,74.93 54.864,74.93 ; 18.288,74.93 24.257,74.93 ; 24.257,74.93 30.607,74.93 ; 30.607,74.93 36.576,74.93 ; 36.576,74.93 42.799,74.93 ; 42.799,74.93 49.022,74.93 ; 49.022,74.93 54.864,74.93
IN220vacPUT02: J1.3 | length 2.7
  Bottom Layer w0.5: 27.686,86.36 J1.3
IN220vacPUT2N: J5.1 U10.2 U11.2 U12.2 U13.2 U14.2 U15.2 U16.2 U17.2 U18.2 | length 81
  Bottom Layer w1: J5.1 106.807,88.486 106.172,87.851 U10.2 106.249,77.012 106.249,76.25 107.696,74.803 112.141,74.803 ; U11.2 112.316,74.978 112.141,74.803 ; U12.2 118.383,77.012 118.383,74.949 118.237,74.803 ; U13.2 124.603,74.914 124.714,74.803 ; U14.2 130.746,74.867 130.683,74.803 ; U15.2 136.89,74.819 136.906,74.803 ; U16.2 143.034,74.898 143.129,74.803 ; U17.2 149.254,77.012 149.254,74.901 149.352,74.803 ; U18.2 155.321,75.389 154.735,74.803 149.352,74.803 ; 112.141,74.803 118.237,74.803 ; 118.237,74.803 124.714,74.803 ; 124.714,74.803 130.683,74.803 ; 130.683,74.803 136.906,74.803 ; 136.906,74.803 143.129,74.803 ; 143.129,74.803 149.352,74.803
IN220vacPUT03: J1.4 R20.1 | length 2.7
  Bottom Layer w0.5: R20.1 J1.4
IN220vacPUT04: J1.5 R21.1 | length 2.7
  Bottom Layer w0.5: R21.1 J1.5
IN220vacPUT05: J1.6 R22.1 | length 2.7
  Bottom Layer w0.5: R22.1 J1.6
IN220vacPUT06: J1.7 R23.1 | length 2.7
  Bottom Layer w0.5: R23.1 J1.7
IN220vacPUT07: J1.8 R29.1 | length 2.7
  Bottom Layer w0.5: R29.1 J1.8
IN220vacPUT08: J1.9 R30.1 | length 2.7
  Bottom Layer w0.5: R30.1 J1.9
IN220vacPUT09: J1.10 R31.1 | length 2.7
  Bottom Layer w0.5: R31.1 J1.10
IN220vacPUT10: J5.2 R32.1 | length 2.7
  Bottom Layer w0.5: R32.1 J5.2
IN220vacPUT11: J5.3 R33.1 | length 2.7
  Bottom Layer w0.5: J5.3 J5.3 116.968,86.361 R33.1
IN220vacPUT12: J5.4 R39.1 | length 2.7
  Bottom Layer w0.5: J5.4 122.049,89.025 122.049,86.362 R39.1
IN220vacPUT13: J5.5 R40.1 | length 2.7
  Bottom Layer w0.5: J5.5 127.13,89.024 127.13,86.363 R40.1
IN220vacPUT14: J5.6 R41.1 | length 2.7
  Bottom Layer w0.5: J5.6 132.211,89.023 132.211,86.364 R41.1
IN220vacPUT15: J5.7 R42.1 | length 2.7
  Bottom Layer w0.5: J5.7 137.292,89.022 137.292,86.365 R42.1
IN220vacPUT16: J5.8 R47.1 | length 2.7
  Bottom Layer w0.5: J5.8 142.373,89.021 142.373,86.366 R47.1
IN220vacPUT17: J5.9 R48.1 | length 2.7
  Bottom Layer w0.5: J5.9 147.454,89.02 147.454,86.367 R48.1
IN220vacPUT18: J5.10 R49.1 | length 2.7
  Bottom Layer w0.5: J5.10 152.535,89.019 152.535,86.368 R49.1
INPUT-flag01: J7.10 R24.2 U1.3 | length 84.7
  Bottom Layer w0.5: U1.3 12.192,65.952 12.723,65.421 36.052,65.421 38.457,63.016 52.681,63.016 57.658,58.039 75.184,58.039 79.883,53.34 81.897,53.34 84.283,50.954 J7.10 84.306,50.531 84.306,48.155 R24.2
INPUT-flag02: J8.11 R25.2 U2.3 | length 78.4
  Bottom Layer w0.5: U2.3 18.288,69.069 21.182,66.175 36.364,66.175 38.769,63.77 52.993,63.77 57.97,58.793 80.112,58.793 86.823,65.504 J8.11 R25.2
INPUT-flag03: J8.10 R26.2 U3.3 | length 69.2
  Bottom Layer w0.5: U3.3 24.384,69.069 26.524,66.929 36.677,66.929 39.082,64.524 53.306,64.524 58.283,59.547 78.326,59.547 84.283,65.504 J8.10 R26.2
INPUT-flag04: J8.9 R27.2 U4.3 | length 59.9
  Bottom Layer w0.5: U4.3 30.48,69.069 31.866,67.683 36.989,67.683 39.394,65.278 53.618,65.278 58.595,60.301 76.54,60.301 81.743,65.504 J8.9 R27.2
INPUT-flag05: J8.8 R28.2 U5.3 | length 50.6
  Bottom Layer w0.5: U5.3 36.576,69.215 39.751,66.04 53.922,66.04 58.907,61.055 74.754,61.055 79.203,65.504 J8.8 R28.2
INPUT-flag06: J8.7 R34.2 U6.3 | length 41.4
  Bottom Layer w0.5: U6.3 42.672,68.961 44.704,66.929 54.1,66.929 59.22,61.809 72.968,61.809 76.663,65.504 J8.7 R34.2
INPUT-flag07: J8.6 R35.2 U7.3 | length 32.3
  Bottom Layer w0.5: U7.3 48.768,68.834 49.737,67.865 54.23,67.865 59.532,62.563 71.182,62.563 74.123,65.504 J8.6 R35.2
INPUT-flag08: J8.5 R36.2 U8.3 | length 23.3
  Bottom Layer w0.5: U8.3 55.036,69.297 55.036,68.218 59.937,63.317 69.396,63.317 71.583,65.504 J8.5 R36.2
INPUT-flag09: J8.4 R37.2 U9.3 | length 18.1
  Bottom Layer w0.5: U9.3 60.96,69.069 59.436,67.545 59.436,65.151 60.516,64.071 67.61,64.071 69.043,65.504 J8.4 R37.2
INPUT-flag10: J8.20 R38.2 U10.3 | length 11.4
  Bottom Layer w0.5: R38.2 102.608,73.814 102.858,73.564 103.22,73.564 106.018,70.766 106.018,69.223 108.765,66.476 109.267,66.476 109.683,66.06 J8.20
INPUT-flag11: J8.19 R43.2 U11.3 | length 19.2
  Bottom Layer w0.5: R43.2 103.632,71.755 104.775,70.612 104.775,68.428 107.143,66.06 J8.19 107.143,65.504 108.568,64.079 111.098,64.079 112.316,65.297 U11.3
INPUT-flag12: J8.18 R44.2 U12.3 | length 20.6
  Bottom Layer w0.5: R44.2 103.366,68.08 104.431,67.015 104.431,66.076 J8.18 104.603,65.504 106.782,63.325 111.41,63.325 117.009,68.924 118.044,68.924 118.459,69.34 U12.3
INPUT-flag13: J8.17 R45.2 U13.3 | length 29.7
  Bottom Layer w0.5: R45.2 101.503,67.013 102.063,66.453 102.063,65.504 104.996,62.571 111.722,62.571 116.675,67.524 123.15,67.524 124.603,68.977 U13.3
INPUT-flag14: J8.16 R46.2 U14.3 | length 38.6
  Bottom Layer w0.5: R46.2 99.523,65.504 103.21,61.817 112.035,61.817 116.988,66.77 128.442,66.77 130.746,69.075 U14.3
INPUT-flag15: J8.15 R51.2 U15.3 | length 47.9
  Bottom Layer w0.5: R51.2 96.983,65.504 101.424,61.063 112.347,61.063 117.3,66.016 128.754,66.016 130.278,67.54 135.361,67.54 136.89,69.069 U15.3
INPUT-flag16: J8.14 R52.2 U16.3 | length 57.2
  Bottom Layer w0.5: R52.2 94.443,65.504 99.638,60.309 112.659,60.309 117.612,65.262 129.117,65.262 130.641,66.786 140.751,66.786 143.034,69.069 U16.3
INPUT-flag17: J8.13 R53.2 U17.3 | length 66.6
  Bottom Layer w0.5: R53.2 91.903,65.504 97.852,59.555 112.972,59.555 117.925,64.508 129.429,64.508 130.953,66.032 146.169,66.032 149.177,69.04 U17.3
INPUT-flag18: J8.12 R54.2 U18.3 | length 75.8
  Bottom Layer w0.5: R54.2 J8.12 89.363,65.504 96.066,58.801 113.284,58.801 118.237,63.754 129.741,63.754 131.265,65.278 151.511,65.278 155.321,69.088 U18.3
nc-Rel1: J2.1 Rel1.4 | length 7
  Bottom Layer w2: Rel1.4 57.808,14.337 59.175,12.971 J2.1
nc-Rel2: J2.4 Rel2.4 | length 7.6
  Bottom Layer w2: Rel2.4 41.43,18.982 41.43,17.371 43.744,15.057 43.744,12.891 J2.4
nc-Rel3: J2.7 Rel3.4 | length 8.1
  Bottom Layer w2: Rel3.4 24.86,18.982 24.86,17.939 28.504,14.295 28.504,12.891 J2.7
nc-Rel4: J3.1 Rel4.4 | length 7.4
  Bottom Layer w2: J3.1 105.534,12.891 105.534,14.094 107.326,15.886 107.326,18.982 Rel4.4
nc-Rel5: J3.4 Rel5.4 | length 6.8
  Bottom Layer w2: J3.4 90.103,12.971 90.947,13.815 Rel5.4
nc-Rel6: J3.7 Rel6.4 | length 6.7
  Bottom Layer w2: Rel6.4 74.378,13.456 74.863,12.971 J3.7
nc-Rel7: J4.1 Rel7.4 | length 8.8
  Bottom Layer w2: J4.1 151.511,12.954 157.035,18.478 157.035,18.982 Rel7.4
nc-Rel8: J4.4 Rel8.4 | length 8.5
  Bottom Layer w2: J4.4 136.271,15.113 140.14,18.982 140.465,18.982 Rel8.4
nc-Rel9: J4.7 Rel9.4 | length 7.7
  Bottom Layer w2: J4.7 121.031,12.971 121.666,13.606 121.666,15.875 123.895,18.104 123.895,18.982 Rel9.4
NetD1_2: D1.2 R2.2 | length 3.2
  Bottom Layer w1: D1.2@52.205,41.465 R2.2@55.448,41.465
NetD2_2: D2.2 R8.2 | length 3.2
  Bottom Layer w1: D2.2@101.906,41.465 R8.2@105.15,41.465
NetD3_2: D3.2 R14.2 | length 3.4
  Bottom Layer w1: D3.2 151.626,41.465 154.87,41.465 R14.2
NetD4_1: D4.1 Q1.2 R2.1 Rel1.5 | length 13.1
  Bottom Layer w1: D4.1@56.752,38.608 57.808,37.552 Rel1.5 ; Q1.2 57.404,41.445 57.448,41.4 D4.1@57.448,38.252
NetD5_1: D5.1 Q4.2 R3.1 Rel2.5 | length 13.1
  Bottom Layer w1: D5.1@40.183,38.608 41.239,37.552 Rel2.5 ; D5.1@40.856,38.252 R3.1 40.856,41.5 40.894,41.539 Q4.2
NetD6_1: D6.1 Q7.2 R4.1 Rel3.5 | length 13.1
  Bottom Layer w1: D6.1@23.613,38.608 24.669,37.552 Rel3.5 ; Q7.2 24.257,41.525 24.282,41.5 R4.1 D6.1@24.282,38.252
NetD7_2: D7.2 R3.2 | length 3.2
  Bottom Layer w1: D7.2@35.612,41.465 R3.2@38.856,41.465
NetD8_2: D8.2 R9.2 | length 3.2
  Bottom Layer w1: D8.2@85.344,41.465 R9.2@88.588,41.465
NetD9_2: D9.2 R15.2 | length 3.2
  Bottom Layer w1: D9.2@135.053,41.465 R15.2@138.297,41.465
NetD10_1: D10.1 Q2.2 R8.1 Rel4.5 | length 13.1
  Bottom Layer w1: D10.1@106.461,38.608 107.517,37.552 Rel4.5 ; D10.1@107.15,38.252 R8.1 107.15,41.5 107.188,41.539 Q2.2
NetD11_1: D11.1 Q5.2 R9.1 Rel5.5 | length 13.2
  Bottom Layer w1: D11.1@90.003,38.477 91.059,37.421 Rel5.5@91.059,31.242 ; Q5.2@90.551,43.815 Q5.2 90.551,41.525 90.576,41.5 R9.1 ; D11.1@90.588,38.252 R9.1@90.588,41.4
NetD12_1: D12.1 Q8.2 R10.1 Rel6.5 | length 13.1
  Bottom Layer w1: D12.1@73.322,38.608 74.378,37.552 Rel6.5 ; D12.1@74.003,38.252 R10.1 74.003,42.746 74.025,42.769 74.025,43.18 74.041,43.196 Q8.2
NetD13_2: D13.2 R4.2 | length 3.2
  Bottom Layer w1: D13.2@19.038,41.465 R4.2@22.282,41.465
NetD14_2: D14.2 R10.2 | length 3.2
  Bottom Layer w1: D14.2@68.759,41.465 R10.2@72.003,41.465
NetD15_2: D15.2 R16.2 | length 3.4
  Bottom Layer w1: D15.2 118.543,41.4 R16.2
NetD16_1: D16.1 Q3.2 R14.1 Rel7.5 | length 12.6
  Bottom Layer w1: Q3.2 156.845,41.525 156.87,41.5 R14.1 156.87,38.252 156.698,38.08 157.226,37.552 Rel7.5
NetD17_1: D17.1 Q6.2 R15.1 Rel8.5 | length 13.4
  Bottom Layer w1: D17.1 139.597,38.608 140.656,37.548 Rel8.5 ; D17.1@140.297,38.252 R15.1 140.297,41.5 140.335,41.539 Q6.2
NetD18_1: D18.1 Q9.2 R16.1 Rel9.5 | length 13.3
  Bottom Layer w1: D18.1@123.031,38.608 124.087,37.552 Rel9.5 ; Q9.2 123.698,41.429 123.877,41.25 123.877,38.102
NetD19_1: D19.1 R.2 | length 2.4
  Bottom Layer w0.5: D19.1 20.606,84.741 R.2
NetD19_2: D19.2 U1.1 | length 6.7
  Bottom Layer w0.5: U1.1 14.732,77.489 17.044,79.801 D19.2
NetD20_1: D20.1 R1.2 | length 2.4
  Bottom Layer w0.5: D20.1 25.686,84.741 R1.2
NetD20_2: D20.2 U2.1 | length 5.5
  Bottom Layer w0.5: U2.1 20.828,77.245 21.244,77.661 21.654,77.661 23.368,79.375 24.72,79.375 D20.2
NetD21_1: D21.1 R20.2 | length 2.4
  Bottom Layer w0.5: D21.1 30.766,84.741 R20.2
NetD21_2: D21.2 U3.1 | length 4.5
  Bottom Layer w0.5: U3.1 26.924,77.245 27.565,77.886 27.577,77.886 28.996,79.305 29.73,79.305 D21.2
NetD22_1: D22.1 R21.2 | length 2.4
  Bottom Layer w0.5: D22.1 35.846,84.741 R21.2
NetD22_2: D22.2 U4.1 | length 3.7
  Bottom Layer w0.5: U4.1 33.02,77.296 35.306,79.582 D22.2
NetD23_1: D23.1 R22.2 | length 2.4
  Bottom Layer w0.5: D23.1 40.926,84.741 R22.2
NetD23_2: D23.2 U5.1 | length 3.2
  Bottom Layer w0.5: U5.1 39.116,77.733 39.929,78.545 39.929,79.344 D23.2
NetD24_1: D24.1 R23.2 | length 2.4
  Bottom Layer w0.5: D24.1 46.006,84.741 R23.2
NetD24_2: D24.2 U6.1 | length 2.8
  Bottom Layer w0.5: U6.1 45.212,77.597 45.384,77.769 45.384,78.116 45.466,78.198 D24.2
NetD25_1: D25.1 R29.2 | length 2.4
  Bottom Layer w0.5: D25.1 51.086,84.741 R29.2
NetD25_2: D25.2 U7.1 | length 3
  Bottom Layer w0.5: D25.2 50.546,79.432 51.308,78.67 U7.1
NetD26_1: D26.1 R30.2 | length 2.4
  Bottom Layer w0.5: D26.1 56.166,84.741 R30.2
NetD26_2: D26.2 U8.1 | length 3.4
  Bottom Layer w0.5: D26.2 55.626,79.42 57.404,77.642 U8.1
NetD27_1: D27.1 R31.2 | length 2.4
  Bottom Layer w0.5: D27.1 61.246,84.741 R31.2
NetD27_2: D27.2 U9.1 | length 4.3
  Bottom Layer w0.5: D27.2 61.211,79.296 61.928,79.296 63.5,77.724 U9.1
NetD28_1: D28.1 R32.2 | length 2.3
  Bottom Layer w0.5: R32.2 113.887,84.614 D28.1
NetD28_2: D28.2 U10.1 | length 6.9
  Bottom Layer w0.5: U10.1 108.712,77.489 111.024,79.801 D28.2
NetD29_1: D29.1 R33.2 | length 2.3
  Bottom Layer w0.5: R33.2 118.969,84.612 D29.1
NetD29_2: D29.2 U11.1 | length 5.7
  Bottom Layer w0.5: U11.1 114.856,77.245 115.424,77.814 115.581,77.814 117.568,79.801 D29.2
NetD30_1: D30.1 R39.2 | length 2.3
  Bottom Layer w0.5: R39.2 124.051,84.61 D30.1
NetD30_2: D30.2 U12.1 | length 4.8
  Bottom Layer w0.5: U12.1 120.999,77.245 121.415,77.661 122.32,77.661 123.703,79.044 123.921,79.044 124.46,79.582 D30.2
NetD31_1: D31.1 R40.2 | length 2.3
  Bottom Layer w0.5: R40.2 129.133,84.608 D31.1
NetD31_2: D31.2 U13.1 | length 3.8
  Bottom Layer w0.5: U13.1 127.143,77.245 127.559,77.661 127.7,77.661 129.54,79.501 D31.2
NetD32_1: D32.1 R41.2 | length 2.3
  Bottom Layer w0.5: R41.2 134.215,84.606 D32.1
NetD32_2: D32.2 U14.1 | length 3.3
  Bottom Layer w0.5: U14.1 133.459,77.261 133.459,78.259 134.62,79.42 D32.2
NetD33_1: D33.1 R42.2 | length 2.3
  Bottom Layer w0.5: R42.2 139.297,84.604 D33.1
NetD33_2: D33.2 U15.1 | length 2.8
  Bottom Layer w0.5: U15.1 139.565,77.224 139.565,79.666 D33.2
NetD34_1: D34.1 R47.2 | length 2.3
  Bottom Layer w0.5: R47.2 144.379,84.602 D34.1
NetD34_2: D34.2 U16.1 | length 3
  Bottom Layer w0.5: D34.2 144.78,78.198 145.574,77.404 U16.1
NetD35_1: D35.1 R48.2 | length 2.3
  Bottom Layer w0.5: R48.2 149.461,84.6 D35.1
NetD35_2: D35.2 U17.1 | length 3.5
  Bottom Layer w0.5: D35.2 149.86,79.424 151.717,77.566 U17.1
NetD36_1: D36.1 R49.2 | length 2.3
  Bottom Layer w0.5: R49.2 154.543,84.598 D36.1
NetD36_2: D36.2 U18.1 | length 4.6
  Bottom Layer w0.5: D36.2 155.099,79.642 156.197,79.642 157.689,78.15 157.689,77.261 U18.1
NetDB1_2: DB1.2 J6.3 | length 11.6
  Bottom Layer w1: DB1.2 100.33,84.662 J6.3
NetDB1_4: DB1.4 J6.1 | length 4.5
  Bottom Layer w1: J6.1 90.19,89.007 90.19,84.562 DB1.4
NetQ1_3: Q1.3 R5.2 | length 2.5
  Bottom Layer w0.5: R5.2 58.61,46.038 58.61,43.752 Q1.3
NetQ2_3: Q2.3 R6.2 | length 2.5
  Bottom Layer w0.5: R6.2 108.394,46.038 108.394,43.752 Q2.3
NetQ3_3: Q3.3 R7.2 | length 2.5
  Bottom Layer w0.5: R7.2 158.052,46.038 158.052,43.752 Q3.3
NetQ4_3: Q4.3 R11.2 | length 2.5
  Bottom Layer w0.5: R11.2 42.1,46.038 42.1,43.752 Q4.3
NetQ5_3: Q5.3 R12.2 | length 2.5
  Bottom Layer w0.5: R12.2 91.757,46.038 91.757,43.752 Q5.3
NetQ6_3: Q6.3 R13.2 | length 2.5
  Bottom Layer w0.5: R13.2 141.541,46.038 141.541,43.752 Q6.3
NetQ7_3: Q7.3 R17.2 | length 2.5
  Bottom Layer w0.5: R17.2 25.463,46.038 25.463,43.752 Q7.3
NetQ8_3: Q8.3 R18.2 | length 2.5
  Bottom Layer w0.5: R18.2 75.248,46.038 75.248,43.752 Q8.3
NetQ9_3: Q9.3 R19.2 | length 2.5
  Bottom Layer w0.5: R19.2 124.904,46.038 124.904,43.752 Q9.3
NetR50_2: R50.2 U20.4 | length 8.3
  Bottom Layer w0.5: U20.4 39.624,57.912 40.458,58.746 40.914,58.746 41.164,58.996 R50.2
NetR55_2: R55.2 U20.5 | length 11.1
  Bottom Layer w0.5: U20.5 31.161,55.397 32.406,56.642 40.259,56.642 40.544,56.927 40.914,56.927 41.164,57.177 R55.2
NetR56_2: R56.2 U20.3 | length 11.5
  Bottom Layer w0.5: U20.3 31.161,57.912 32.431,59.182 39.116,59.182 40.458,60.524 40.914,60.524 41.164,60.774 R56.2
NetR57_2: R57.2 U20.6 | length 7.9
  Bottom Layer w0.5: U20.6 33.465,55.41 41.075,55.41 R57.2
no-Rel1: J2.3 Rel1.3 | length 7.8
  Bottom Layer w2: Rel1.3 46,18.982 46,17.627 48.824,14.803 48.824,12.891 J2.3
no-Rel2: J2.6 Rel2.3 | length 8.4
  Bottom Layer w2: Rel2.3 29.43,18.982 29.43,17.814 33.584,13.66 33.584,12.891 J2.6
no-Rel3: J2.9 Rel3.3 | length 8.9
  Bottom Layer w2: Rel3.3 18.344,13.498 18.344,12.891 J2.9
no-Rel4: J3.3 Rel4.3 | length 6.6
  Bottom Layer w2: J3.3 95.183,12.971 95.517,13.305 Rel4.3
no-Rel5: J3.6 Rel5.3 | length 6.9
  Bottom Layer w2: Rel5.3 78.947,13.966 79.943,12.971 J3.6
no-Rel6: J3.9 Rel6.3 | length 7.4
  Bottom Layer w2: Rel6.3 62.378,18.902 62.992,18.288 62.992,14.682 64.703,12.971 J3.9
no-Rel7: J4.3 Rel7.3 | length 8.1
  Bottom Layer w2: J4.3 141.351,12.971 141.851,13.471 141.851,14.47 145.035,17.654 145.035,18.982 Rel7.3
no-Rel8: J4.6 Rel8.3 | length 7.5
  Bottom Layer w2: J4.6 126.111,12.971 127.635,14.495 127.635,17.881 128.656,18.902 Rel8.3
no-Rel9: J4.9 Rel9.3 | length 7
  Bottom Layer w2: J4.9 110.871,12.971 111.506,13.606 111.506,18.322 112.087,18.902 Rel9.3
OUTPUT1: J7.4 R5.1 | length 24.6
  Bottom Layer w0.5: R5.1 51.81,46.101 58.033,52.324 68.326,52.324 68.871,51.779 68.871,50.726 J7.4
OUTPUT2: J7.5 R11.1 | length 43.9
  Bottom Layer w0.5: R11.1 35.655,49.919 54.562,49.919 57.737,53.094 69.443,53.094 71.583,50.954 J7.5
OUTPUT3: J7.6 R17.1 | length 64.2
  Bottom Layer w0.5: R17.1 22.349,46.101 22.642,46.394 22.642,47.243 26.072,50.673 54.249,50.673 57.424,53.848 71.229,53.848 74.123,50.954 J7.6
OUTPUT4: J7.15 R6.1 | length 4.9
  Bottom Layer w0.5: J7.15 96.983,47.428 98.131,46.28 R6.1
OUTPUT5: J7.9 R12.1 | length 4.6
  Bottom Layer w0.5: R12.1 81.619,46.226 81.619,50.43 J7.9
OUTPUT6: J7.3 R18.1 | length 5.1
  Bottom Layer w0.5: R18.1 64.984,48.635 66.503,50.154 J7.3
OUTPUT7: J7.13 R7.1 | length 60.6
  Bottom Layer w0.5: J7.13 91.903,50.882 94.861,53.84 111.361,53.84 115.29,49.911 143.978,49.911 R7.1
OUTPUT8: J7.14 R13.1 | length 41
  Bottom Layer w0.5: J7.14 94.443,50.954 96.575,53.086 111.048,53.086 115.055,49.08 128.299,49.08 R13.1
OUTPUT9: J7.16 R19.1 | length 20
  Bottom Layer w0.5: J7.16 99.523,51.136 100.545,52.158 110.91,52.158 114.489,48.579 114.489,46.253 R19.1
PA6: J7.11
PA7: J7.12
PC13: J7.2
RESET: J7.17
UART2-rx: J7.8 U20.8 | length 49.2
  Bottom Layer w0.5: U20.8 48.158,52.857 50.8,55.499 74.658,55.499 79.203,50.954 J7.8
UART2-tx: J7.7 U20.1 | length 69.2
  Bottom Layer w0.5: U20.1 30.536,60.452 29.357,59.273 29.357,54.899 30.138,54.117 48.352,54.117 50.512,56.277 75.583,56.277 80.518,51.342 80.518,48.768 80.01,48.26 77.47,48.26 76.663,49.067 J7.7
VBAT: J7.1
pads on no net: "R1. "
copper on no net:
  other v2: 17.967,27.744 151.967,27.744

## Polygon pours and split planes (outlines as drawn)
GND on Bottom Layer "GND_L02_P002" (solid, remove dead copper, pour order 2): 9.779,68.453 11.557,70.231 64.643,70.231 66.479,70.797 72.644,76.962 100.608,76.962 100.608,71.755 106.553,70.231 159.766,70.231 159.766,40.64 9.779,40.64

## Silkscreen, mask and mechanical layers (free items; w line width, h text height)
Top Overlay:
  lines w0.24: 9.959,89.729 13.959,89.729 ; 9.967,11.744 13.967,11.744 13.967,9.744 ; 13.959,89.719 13.959,91.719 ; 155.959,91.729 155.959,89.729 159.959,89.729 ; 155.967,9.754 155.967,11.754 ; 155.967,11.744 159.967,11.744
  lines w0.254: 10,107.946 10,108.454 ; 13,107.2 10,108.2 ; 13,109.2 10,108.2 ; 73.249,108.202 10,108.2 ; 96.751,108.202 160,108.204 ; 157,107.204 160,108.204 ; 157,109.204 160,108.204 ; 160,107.95 160,108.458 ; 176.467,13.77 177.8,9.77 ; 176.467,87.77 177.8,91.77 ; 177.546,9.77 178.054,9.77 ; 177.546,91.77 178.054,91.77 ; 177.8,37.187 177.8,9.77 ; 177.8,64.353 177.8,91.77 ; 179.133,13.77 177.8,9.77 ; 179.133,87.77 177.8,91.77
  text "150 (mm)" at 73.503,105.702 h3
  text "82 (mm)" at 180.799,37.441 h4 r90
Mechanical 1:
  lines w0.1: 9.967,8.669 9.967,9.769 ; 159.967,8.694 159.967,9.794
  lines w0.24: 10,9.744 10,91.744 160,91.744 160,9.744
  lines w0.254: 10,9.744 160,9.744
Mechanical 13:
  lines w0.1: 9.967,8.669 159.967,8.669